# Altium PCB PCB1.PcbDoc
Units mil, origin at the board's own origin, x right, y up, seen from the top; angles counter-clockwise.
Board outline 9050 x 5130 mil, 2 copper layers (Top Layer, Bottom Layer); 85 components, 38 nets, 202 pads, 8 vias.
Unrouted connection lines stored in the file: 1.
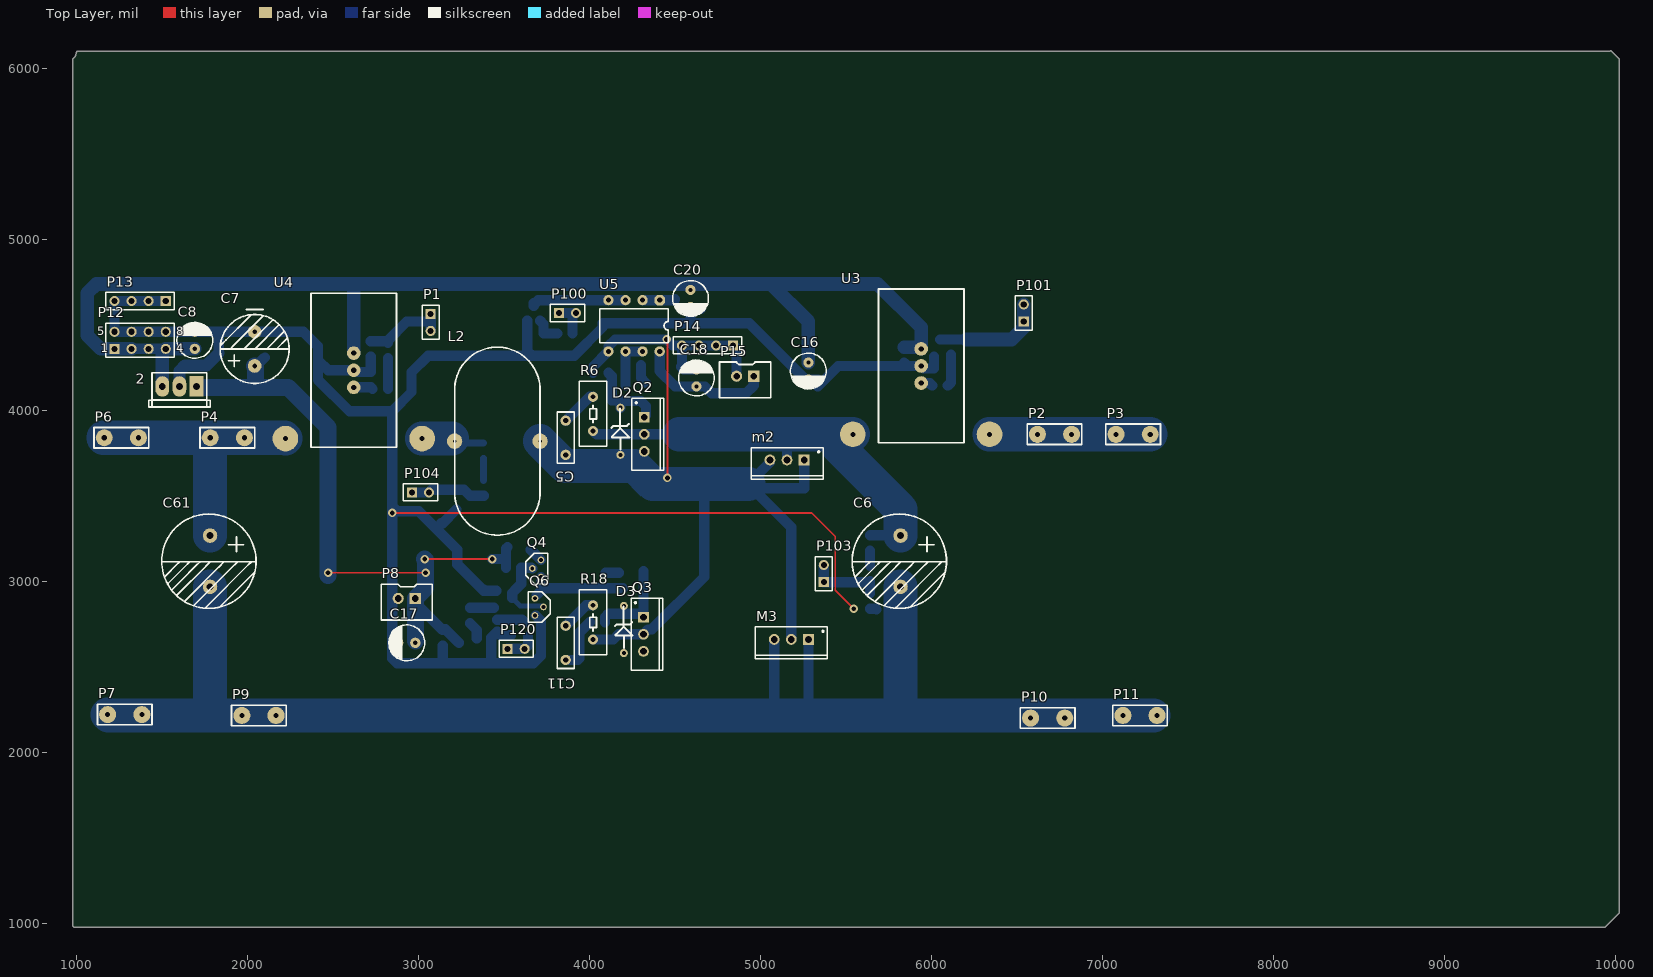
[diagram p0: Top Layer view]
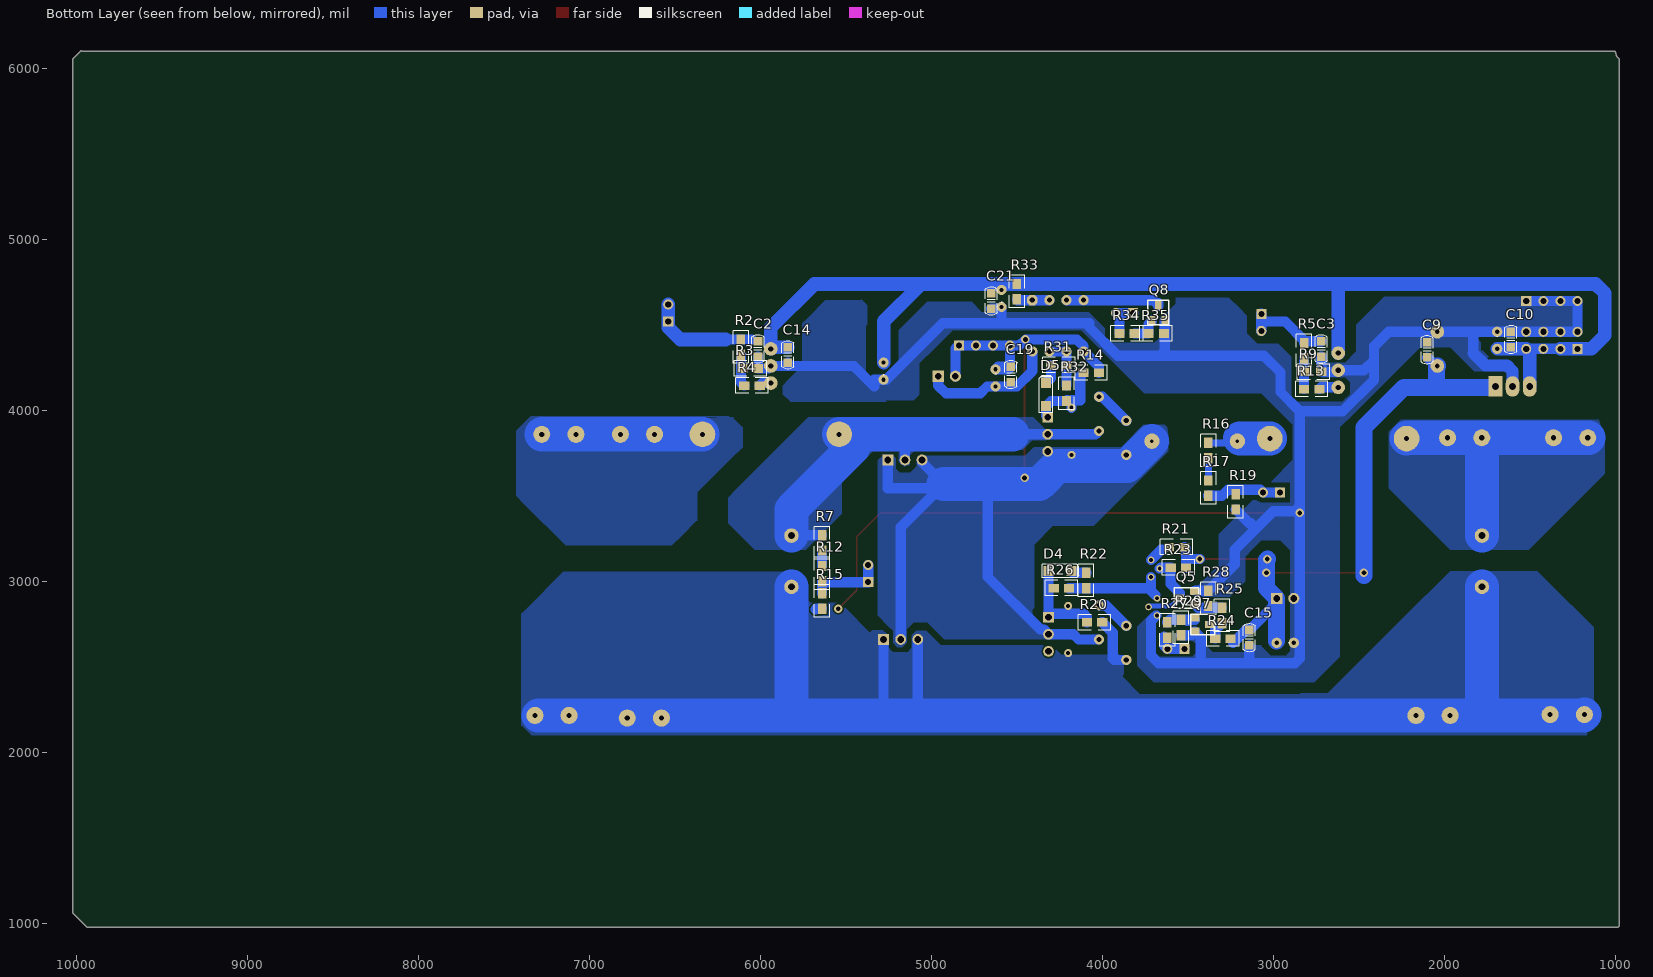
[diagram p1: Bottom Layer view, seen from below]
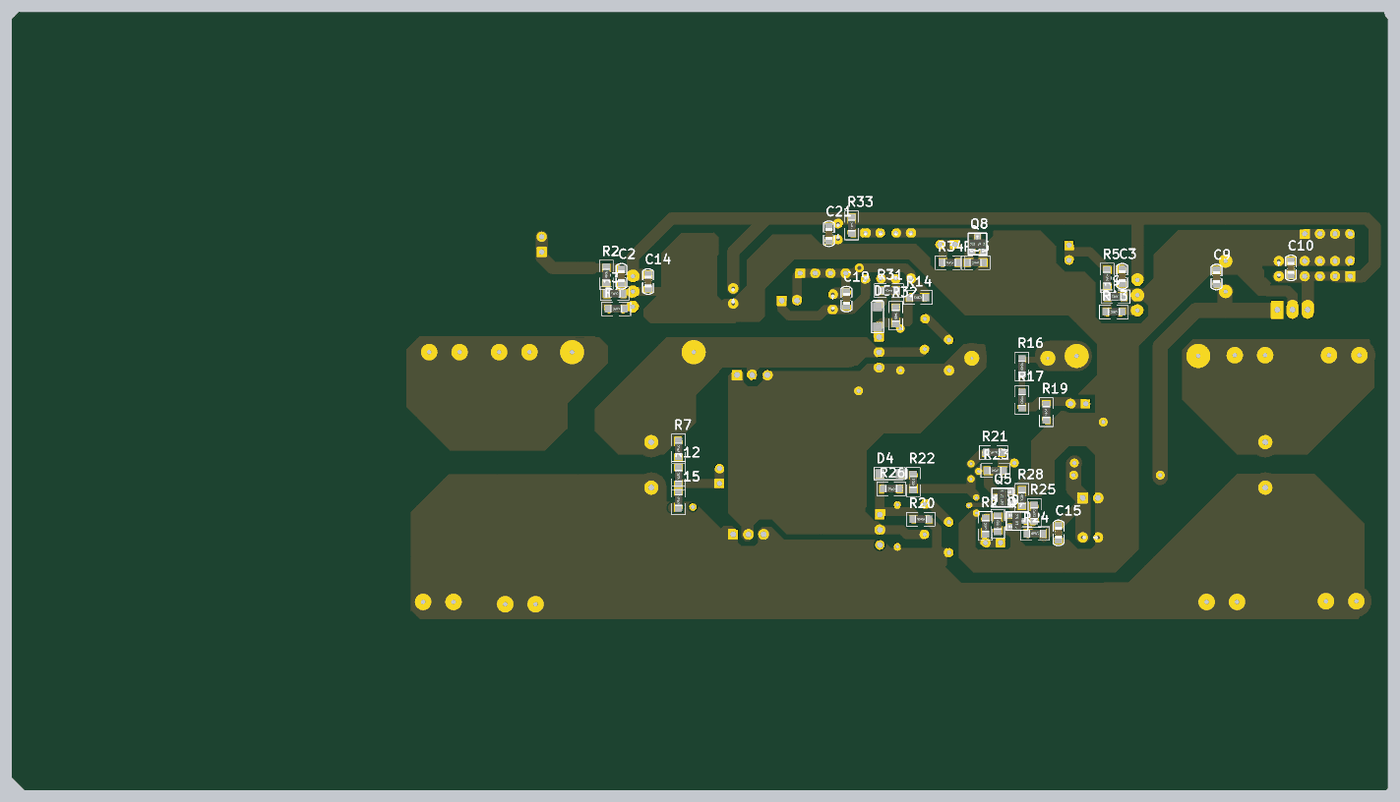
[diagram p2: 3D render of the assembled board from below, using the file's embedded part models]

## Layer stack, top to bottom
Top Layer: signal copper 1.4
Dielectric: dielectric 12.6, FR-4, Dk 4.8
Bottom Layer: signal copper 1.4

## Board outline
990,6070 975,6055 975,1005 975,985 980,980 985,975 1110,975 9940,975 10020,1055 10025,1060 10025,1160 10025,6055 9975,6105 9970,6100 1000,6100

## Design rules (kind name [scope] priority, off if disabled: settings)
Clearance [InNet('NetP104_1')] p1: gap=30
PlaneConnect [All] p1: planeconnectstyle=Direct reliefexpansion=20 reliefentries=4 reliefconductorwidth=10 reliefairgap=10
PolygonConnect [All] p1: connectstyle=Direct reliefconductorwidth=10 reliefentries=4 polygonreliefangle="90 Angle"
RoutingVias [All] p1: holewidth=28 width=50 viastyle="Through Hole" minholewidth=28 minwidth=50 maxholewidth=28 maxwidth=50
SilkscreenOverComponentPads [All] p1: minsilkscreentomaskgap=10
SolderMaskExpansion [All] p1: expansion=4
Width [All] p1: maxlimit=200 minlimit=10 preferedwidth=60 toplayer_maxwidth=10 toplayer_prefwidth=10 minimp=50.000000 maximp=50.000000 favimp=50.000000
26 further rules are at their usual default settings.

## Components (designator, comment, footprint, x,y, rotation, side; value= is the part's Value field where it differs from the comment)
2 "Volt Reg" 7812 1700,4140 r180 top
C2 "103" C0805 6015,4405 r270 bottom
C3 "103" C0805 2720,4405 r270 bottom
C5 "681" 接线端子 3860,3940 r270 top
C6 "1000UuF 63V" RB.4/.8 5820,3120 r270 top
C7 "" RB.2/.4_1 2040,4260 r90 top
C8 "" RB.1/.2 1690,4360 r90 top
C9 "104" C0805 2100,4400 r270 bottom
C10 "104" C0805 1610,4460 r270 bottom
C11 "681" 接线端子 3860,2740 r270 top
C14 "104" C0805 5840,4280 r90 bottom
C15 "104" C0805 3140,2625 r90 bottom
C16 "" RB.1/.2 5280,4280 r270 top
C17 "" RB.1/.2 2980,2640 r180 top
C18 "10uF/25V" RB.1/.2 4625,4140 r90 top
C19 "104" C0805 4535,4165 r90 bottom
C20 "10uF/16V" RB.1/.2 4590,4705 r270 top
C21 "104" C0805 4650,4685 r270 bottom
C61 "1000UuF 63V" RB.4/.8 1780,3120 r270 top
D2 "D Zener" DIODE0.4_ZD 4180,3740 r90 top
D3 "D Zener" DIODE0.4_ZD 4200,2580 r90 top
D4 "1N4148" 1206d 4315,3060 r180 bottom
D5 "1N4148" 1206d 4330,4025 r90 bottom
L2 "12uH" 130060 3460,3820 r0 top
m2 "MBR20100" SFM-T3/A4.7V 5155,3710 r180 top
M3 "MBR20100" SFM-T3/A4.7V 5180,2660 r180 top
P1 "I1电流检测" HDR1X2 3070,4565 r270 top
P2 "Header 2" 冷压插头 6720,3860 r180 top
P3 "Header 2" 冷压插头 7180,3860 r180 top
P4 "Header 2" 冷压插头 1880,3840 r0 top
P6 "Header 2" 冷压插头 1260,3840 r180 top
P7 "Header 2" 冷压插头 1280,2220 r180 top
P8 "Header 2" SIP2_B 2980,2900 r180 top
P9 "Header 2" 冷压插头 2065,2215 r180 top
P10 "Header 2" 冷压插头 6680,2200 r180 top
P11 "Header 2" 冷压插头 7220,2215 r0 top
P12 "" HDR2X4_CEN 1220,4360 r0 top
P13 "Header 4" HDR1X4 1520,4640 r180 top
P14 "Header 4" HDR1X4 4840,4380 r180 top
P15 "Header 2" SIP2_B 4960,4200 r180 top
P100 "Header 2" HDR1X2 3820,4570 r0 top
P101 "I2电流检测" HDR1X2 6540,4520 r90 top
P103 "U2电压检测" HDR1X2 5370,2995 r90 top
P104 "U1电压检测" HDR1X2 2960,3520 r0 top
P120 "Header 2" HDR1X2 3520,2605 r0 top
Q2 "IRF830" SFM-T3/A4.7V 4320,3860 r270 top
Q3 "IRF830" SFM-T3/A4.7V 4315,2690 r270 top
Q4 "8050" TO-92 3715,3025 r270 top
Q5 "PJ2306" sot-23 3460,2865 r90 bottom
Q6 "8550" TO-92 3680,2900 r90 top
Q7 "PJ2306" sot-23 3460,2785 r270 bottom
Q8 "BSS138" sot-23 3710,4525 r180 bottom
R2 "Res2" R0805 6115,4325 r90 bottom
R3 "51K" R0805 6015,4245 r0 bottom
R4 "10K" R0805 6095,4145 r180 bottom
R5 "Res2" R0805 2820,4305 r90 bottom
R6 "20Ω/2W" S-R2W 4020,3880 r90 top
R7 "Res2" R0805 5640,3180 r90 bottom
R9 "51K" R0805 2720,4225 r0 bottom
R12 "Res2" R0805 5640,3000 r90 bottom
R13 "10K" R0805 2820,4125 r180 bottom
R14 "Res2" R0805 4020,4220 r0 bottom
R15 "Res2" R0805 5640,2840 r90 bottom
R16 "0" R0805 3380,3720 r90 bottom
R17 "22K" R0805 3380,3500 r90 bottom
R18 "20Ω/2W" S-R2W 4020,2660 r90 top
R19 "3K" R0805 3220,3420 r90 bottom
R20 "Res2" R0805 4000,2760 r0 bottom
R21 "Res2" R0805 3520,3200 r0 bottom
R22 "10Ω" R0805 4095,2960 r90 bottom
R23 "Res2" R0805 3600,3080 r180 bottom
R24 "Res2" R0805 3340,2665 r180 bottom
R25 "100R" R0805 3300,2845 r270 bottom
R26 "20Ω" R0805 4195,2960 r0 bottom
R27 "100R" R0805 3620,2760 r270 bottom
R28 "Res2" R0805 3380,2945 r270 bottom
R29 "Res2" R0805 3540,2685 r90 bottom
R31 "Res2" R0805 4210,4265 r0 bottom
R32 "20Ω" R0805 4210,4145 r270 bottom
R33 "470Ω" R0805 4500,4740 r270 bottom
R34 "100Ω" R0805 3900,4450 r180 bottom
R35 "Res2" R0805 3640,4450 r0 bottom
U3 "huo er" 霍尔传感器-40A 5940,4260 r90 top
U4 "huo er" 霍尔传感器-40A 2620,4235 r90 top
U5 "TPL3120" DIP-8 4410,4645 r270 top

## Footprints (in the part's own frame and the unit in brackets; to place one, negate y for a bottom-side part, rotate by r counter-clockwise, add the part's x,y. Pads: shape width x height; smd on the part's side, far side on the other; paste and mask are expansions set on the pad)
1206d [mil]
  rect 60x60 smd: 1(0,0) 2(135,0)
  silkscreen extent -38,-40 178,40
7812 [mil]
  rect 80x120 hole 39.37: 1(0,0)
  oval 80x120 hole 39.37: 2(100,0) 3(200,0)
  silkscreen extent -80,-80 280,120
130060 [mil]
  round 90 hole 20: 1(-250,0) 2(250,0)
  silkscreen extent -250,-550 250,550
C0805 [mil]
  rect 50x50 smd: 1(0,0) 2(90,0)
  silkscreen extent -39,-36 129,36, body extent 6,-24 85,23, height 47
DIODE0.4_ZD [mm]
  round 1.2 hole 0.6: 1(0,0) 2(7,0)
  silkscreen extent 0.78,-1.32 6.9,1.32
DIP-8 [mil]
  oct 60x60 hole 30: 1(0,0)
  round 60 hole 30: 2(0,-100) 3(0,-200) 4(0,-300) 5(300,-300) 6(300,-200) 7(300,-100) 8(300,0)
  silkscreen extent 50,-350 250,50, body extent -5,-365 305,65, height 200
HDR1X2 [mm] "Connector; Header; 2 Position"
  rect 1.5x1.5 hole 0.9: 1(0,0)
  round 1.5 hole 0.9: 2(2.54,0)
  silkscreen extent -1.27,-1.27 3.81,1.27
HDR1X4 [mm] "Connector; Header; 4 Position"
  rect 1.5x1.5 hole 0.9: 1(0,0)
  round 1.5 hole 0.9: 2(2.54,0) 3(5.08,0) 4(7.62,0)
  silkscreen extent -1.27,-1.27 8.89,1.27
HDR2X4_CEN [mm] "Connector; Header; 4x2 Position"
  rect 1.5x1.5 hole 0.9: 1(0,0)
  round 1.5 hole 0.9: 2(2.54,0) 3(5.08,0) 4(7.62,0) 5(0,2.54) 6(2.54,2.54) 7(5.08,2.54) 8(7.62,2.54)
  silkscreen extent -1.27,-1.27 8.89,3.81
R0805 [mil]
  rect 60x50 smd: 1(0,0) 2(90,0)
  silkscreen extent -50,-45 140,45, body extent 6,-25 85,25, height 22
RB.1/.2 [mil]
  round 60 hole 25: 1(0,0) 2(100,0)
  silkscreen extent -55,-105 155,105, body extent -50,-99 148,100, height 454
RB.2/.4_1 [mil]
  round 80 hole 27.56: 1(0,0) 2(200,0)
  silkscreen extent -102,-202 330,202
RB.4/.8 [mm]
  round 2.159 hole 1: 1(-3.75,-0.025) 2(3.87,-0.025)
  silkscreen extent -6.95,-7.21 7.07,6.81
S-R2W [mm]
  round 1.5 hole 0.7: 1(-0.006,0) 2(5.074,0)
  silkscreen extent -2.29,-2.03 7.36,2.03
SFM-T3/A4.7V [mm] "TO, Thru-Hole, Vertical, Heatsink Mounted; 3 In-Line Leads; Pitch 2.54 mm"
  rect 1.6x1.6 hole 1: 1(-2.54,0)
  round 1.6 hole 1: 2(0,0) 3(2.54,0)
  silkscreen extent -5.35,-1.85 5.35,2.85, body extent -5.4,-1.9 5.4,2.9, height 19.3
SIP2_B [mil]
  rect 65x65 hole 39.37: 1(0,0)
  round 65 hole 39.37: 2(100,0)
  silkscreen extent -100,-83 200,126
sot-23 [mm]
  rect 1x1.4 smd: 1(0,0) 2(1.9,0) 3(0.95,2.2)
  silkscreen extent -0.6,-0.6 2.5,3, body extent -0.51,-0.18 2.39,2.62
TO-92 [mm]
  round 1 hole 0.55: 1(0,0) 2(-1.27,-1.27) 3(-2.54,0)
  silkscreen extent -3.56,-2.29 1.02,1.02
冷压插头 [mil]
  round 100 hole 30: 1(-100,0) 2(100,0)
  silkscreen extent -160,-60 160,60
接线端子 [mil]
  round 60 hole 30: 1(0,0) 2(200,0)
  silkscreen extent -50,-50 250,50
霍尔传感器-40A [mil]
  round 80 hole 30: 1(-100,0) 2(0,0) 3(100,0)
  round 150 hole 30: 4(-400,400) 5(-400,-400)
  silkscreen extent -450,-250 450,250

## Part data
2: "Voltage Regulator"
C2 C3 C9 C10 C14 C15: library part CAP, "Capacitor"
C5 C11 C19 C21: library part Cap, "Capacitor"
C6 C18 C20 C61: library part "CAPACITOR POL", "Capacitor"
C7 C8 C16 C17: library part "Cap Pol1", "Polarized Capacitor (Radial)"
D2 D3: "Zener Diode"
D4 D5: library part Diode, "Default Diode"
L2: library part Inductor_2, "Inductor"
m2 M3: library part 20010
P1 P101 P103 P104: library part "Header 2", "Header, 2-Pin"
P2 P3 P4 P6 P7 P8 P9 P10 P11 P15 P100 P120: "Header, 2-Pin"
P12: library part "Header 4X2A", "Header, 4-Pin, Dual row"
P13 P14: "Header, 4-Pin"
Q2 Q3 Q5 Q7 Q8: library part IRF840, "CQ-IRF840"
Q4: library part 2N3904, "NPN General Purpose Amplifier"
Q6: library part PNP, "PNP Bipolar Transistor"
R2 R5 R7 R12 R14 R15 R20 R21 R23 R24 R28 R29 R31 R35: "Resistor"
R3 R4 R9 R13 R16 R17 R19 R22 R25 R26 R27 R32 R33 R34: library part Res2, "Resistor"
R6 R18: library part R
U3 U4: library part HOUER
U5: library part LM386

## Via types
v1: diameter 50, hole 28, Top Layer to Bottom Layer, 8 vias

## Nets (pads, with @x,y where several pads share a name; then routed paths per layer and width w, separated by ;. In a path a pad name is that pad's centre, name@x,y a point inside that pad or via, vN(x,y) a via of type N, cw(c..) or ccw(c..) an arc to the next point about the centre after c; other vN are vias at no path point)
GND: C6.2 C11.2 C61.2 D3.1 M3.1 M3.3 P7.1 P7.2 P9.1 P9.2 P10.1 P10.2 P11.1 P11.2 R20.1 | length 8745.7
  Bottom Layer w60: C11.2@3880,2540 3930,2540 ; 3940,2550 3940,2700 R20.1 ; 5080,2240 M3.3 ; 5280,2245 M3.1
  Bottom Layer w200: P7.2 1185,2215 1760,2215 ; C61.2 1779.02,2234.02 1760,2215 ; 5819.02,2215 P9.1 P9.2 1760,2215 ; C6.2 5819.02,2230.98 5835,2215 P11.1 P11.2@7300,2215
GND1: 2.2 C2.2 C3.2 C7.2 C8.2 C9.1 C10.1 C14.1 C15.1 C16.2 C17.2 C20.2 C21.2 P8.2 P12.5 P12.6 P12.7 P12.8 P13.1 P13.2 P13.3 P13.4 Q5.2 Q6.3 Q7.2 Q8.2 R3.1 R9.1 R15.1 R19.1 R28.1 R29.1 R35.1 U3.2 U4.2 | length 14861.5
  Top Layer w10: v1(2845,3400) 5300,3400 5437.5,3262.5 5437.5,2947.5 v1(5545,2840)
  Bottom Layer w60: P13.1 P13.2 P13.3 P13.4 P12.5 P12.6 P12.7 P12.8 C10.1 C8.2 1830,4460 ; 1830,4335 1830,4460 ; C3.2 R9.1 2630,4225 U4.2 2470,4235 2410,4295 ; 3130,3340 3140,3340 R19.1 ; 3140,2525 C15.1 ; R28.1@3380,2950 R28.1 ; Q5.2@3454.8,2945 R28.1 ; R29.1 3480,2685 3460,2705 3425,2670 3425,2540 3445,2520 ; Q8.2 3635,4524.8 3635,4320 ; 3660,4325 3655,4320 ; Q6.3@3685,2800 3715,2770 3715,2565 3670,2520 3445,2520 ; C21.2 4600,4595 C20.2 4590,4515 4585,4510 ; 4985,4460 5142.5,4302.5 ; 5335,4140 5455,4260 5640,4260 ; 5335,4180 C16.2 5265,4180 5142.5,4302.5 ; 5600,4260 5640,4260 ; R15.1 5674.02,2840 5679.02,2835 ; C14.1 C14.1@5860,4260 ; C2.2 R3.1 5955,4245 U3.2 C14.1@5860,4260 ; 1830,4460 C7.2 2325,4460 2410,4375 2410,4295 ; 2410,4295 2410,4180 2595,3995 2845,3995 ; 2845,3440 2845,3995 ; 2845,3440 v1(2845,3400) 2845,2900 2845,2550 2875,2520 3445,2520 ; 2845,3440 2875,3410 3000,3410 3225,3185 3225,3100 R28.1 ; 2845,3995 2957.5,4107.5 2957.5,4222.5 3055,4320 3635,4320 ; 3635,4320 3655,4320 ; 3655,4320 3910,4320 4075,4485 4075,4510 4585,4510 ; 4585,4510 4935,4510 5142.5,4302.5 ; 5640,4260 5665,4260 C14.1@5860,4260
  Bottom Layer w70: 2.2 1600,4230 1632.5,4262.5 1757.5,4262.5 1830,4335
NetC2_1: C2.1 P101.1 P101.2 R2.2 | length 654
  Bottom Layer w60: 6050,4415 R2.2 6205,4415
  Bottom Layer w80: 6205,4415 6470,4415 6540,4485 P101.1 P101.2
NetC3_1: C3.1 P1.1 P1.2 R5.2 | length 514.7
  Bottom Layer w60: C3.1 R5.2@2815,4405 ; R5.2 2815,4400 R5.2@2815,4405 ; R5.2@2820,4405 R5.2@2815,4405 ; P1.2 3070,4520 ; P1.1 3070,4520 ; R5.2@2815,4405 2930,4520 3070,4520
NetC5_1: C5.1 R6.2 | length 217.9
  Bottom Layer w60: C5.1 3999.75,4079.75 R6.2
NetC6_1: C6.1 m2.2 Q2.2 R6.1 R7.2 U3.4 | length 2494.2
  Bottom Layer w60: R6.1 4039.75,3860 Q2.2 4525,3860 ; m2.2 5155,3835 ; R7.2 5816.65,3270 C6.1
  Bottom Layer w200: 4525,3860 U3.4 ; 5460,3780 5819.02,3420.98 C6.1
NetC11_1: C11.1 R18.2 | length 209.6
  Bottom Layer w60: C11.1 3979.75,2859.75 R18.2
NetC61_1: C61.1 P4.1 P4.2 P6.1 P6.2 U4.4 | length 1639.8
  Bottom Layer w200: P6.2@1155,3840 1260,3840 1460,3840 P4.1 ; C61.1 1779.02,3839.02 P4.1 ; U4.4 2215,3840 P4.2 P4.1
NetD2_2: D2.2 D5.1 Q2.1 R14.2 R32.2 | length 481.7
  Bottom Layer w60: R14.2 4130,4200 4130,4060 4180,4060 ; D2.2 4180,4035 4205,4060 R32.2 4300,4055 D5.1 4330,3970 Q2.1
NetD3_2: D3.2 D4.1 Q3.1 R20.2 R26.2 | length 541.6
  Bottom Layer w60: R20.2 4090,2790 4110,2810 4295,2810 Q3.1 D4.1
NetD4_2: D4.2 R22.2 | length 75
  Bottom Layer w60: R22.2 D4.2@4170,3050
NetD5_2: D5.2 R31.2 | length 117.4
  Bottom Layer w60: R31.2 4300,4190 D5.2
NetL2_1: L2.1 R16.2 U4.5 | length 380.4
  Bottom Layer w40: L2.1@3195,3835 L2.1 3220,3810 R16.2
  Bottom Layer w60: L2.1@3195,3835 L2.1@3205,3835
  Bottom Layer w200: U4.5 L2.1@3195,3835
NetP2_1: P2.1 P2.2 P3.1 P3.2 U3.5 | length 940
  Bottom Layer w200: U3.5 P2.2 P2.1 P3.2 P3.1
NetP103_1: P103.1 P103.2 R12.1 R15.2 | length 442.1
  Bottom Layer w60: P103.2 P103.1 5635,2995 R12.1 R15.2
NetP104_1: P104.1 P104.2 R17.1 R19.2 | length 440.7
  Bottom Layer w60: P104.1 P104.2 3075,3535 3265,3535 3300,3500 R17.1
NetQ4_1: Q4.2 Q5.3 Q6.2 R23.1 | length 471.9
  Bottom Layer w30: Q5.3 3594.02,2855 3725,2855 Q6.2 ; 3546.61,2931.61 3565,2950
  Bottom Layer w60: Q5.3 3546.61,2931.61 ; 3565,2950 3600,2985 R23.1 3660,3080 Q4.2
NetQ4_2: Q4.3 R21.2 | length 84.9
  Bottom Layer w60: 3655,3185 Q4.3
NetQ4_3: Q4.1 Q6.1 R22.1 R26.1 | length 586.6
  Bottom Layer w60: 3690,2920 3730,2960 R22.1 R26.1 ; 3715,2960 Q4.1
NetQ5_1: Q5.1 R25.1 R28.2 | length 140
  Bottom Layer w60: R25.1 3440,2845
NetQ7_1: Q7.1 R27.1 R29.2 | length 173.5
  Bottom Layer w60: Q7.1@3460,2775 3495,2775 ; 3500.12,2769.88 3495,2775 ; R27.1 3605,2775 R29.2 3495,2775
NetQ7_3: Q7.3 R24.1 R25.2 | length 106.6
  Bottom Layer w60: R25.2 3340,2715 R24.1
NetQ8_1: Q8.1 R34.2 R35.2 | length 163.3
  Bottom Layer w60: Q8.1 3730,4505 R35.2 R34.2
NetQ8_3: Q8.3 U5.3 | length 564.7
  Bottom Layer w60: Q8.3 Q8.3@3672.6,4617.6 ; Q8.3@3672.6,4627.6 Q8.3@3672.6,4617.6 ; U5.3 4110,4645 3700,4645 Q8.3@3672.6,4617.6
NetR2_1: R2.1 R3.2 R4.1 | length 188.3
  Bottom Layer w60: R4.1 6115,4165 R2.1
NetR4_2: R4.2 U3.1 | length 71.2
  Bottom Layer w60: U3.1 5990,4160 R4.2
NetR5_1: R5.1 R9.2 R13.1 | length 180
  Bottom Layer w60: R13.1 R5.1
NetR7_1: R7.1 R12.2 | length 90
  Bottom Layer w60: R12.2 R7.1
NetR13_2: R13.2 U4.1 | length 114.1
  Bottom Layer w60: U4.1 2720,4135 R13.2
NetR16_1: R16.1 R17.2 | length 130
  Bottom Layer w40: R17.2 R16.1
NetR31_1: R31.1 R32.1 U5.6 U5.7 | length 300
  Bottom Layer w60: R32.1 R31.1 U5.6 U5.7
NetR33_2: R33.2 U5.2 | length 192.1
  Bottom Layer w60: U5.2 4410,4645 4495,4645 R33.2
PWM1_IN: P120.1 P120.2 R27.2 | length 178.3
  Bottom Layer w60: P120.1 P120.2 3640,2625 R27.2@3640,2675
PWM2_IN: P100.1 P100.2 R34.1 | length 200
  Bottom Layer w60: P100.1 P100.2 ; R34.1 P100.2@3900,4550
"VCC +12V": 2.1 C7.1 C9.2 C15.2 C17.1 P8.1 R21.1 R23.2 R24.2 | length 3895.9
  Top Layer w10: v1(2470,3050) v1(3040,3050) ; v1(3035,3130) v1(3430,3130)
  Bottom Layer w60: C7.1@2045,4255 C9.2 ; 2980,2840 3015,2840 C15.2@3135,2720 ; C15.2 C15.2@3135,2720 ; R24.2@3235,2640 3155,2720 C15.2@3135,2720 ; v1(3430,3130) 3510,3130 ; R23.2 3510,3130 ; R21.1 3510,3190 3510,3130
  Bottom Layer w100: 1745,4135 2235,4135 2470,3900 v1(2470,3050) v1@2470,3035 ; C7.1 2045,4255 2045,4150 ; C17.1@2980,2652.28 2980,2840 P8.1 3040,2960 v1(3040,3050) 3040,3125 v1(3035,3130)
"VCC +15V": C18.1 C19.1 P15.1 U5.8 | length 792.5
  Bottom Layer w60: U5.8 4410,4230 4500,4140 C18.1 4675,4140 4715,4100 4915,4100 4960,4145 P15.1
VCC+5V: 2.3 C8.1 C10.2 C14.2 C16.1 C20.1 C21.1 P12.1 P12.2 P12.3 P12.4 R33.1 U3.3 U4.3 | length 7303.4
  Bottom Layer w60: P12.2 P12.3 1485,4360
  Bottom Layer w80: P12.2 P12.1 1140,4360 1060,4440 1060,4685 1115,4740 2640,4740 ; 2.3 1500,4340 P12.4 C8.1 ; U4.3 2620,4490 2620,4550 2620,4720 2640,4740 ; C16.1 5280,4520 5060,4740 ; C14.2 5930,4370 U3.3 5940,4485 5685,4740 5060,4740 ; 2640,4740 R33.1 4950,4740 5060,4740
WGND: C5.2 C18.2 C19.2 D2.1 L2.2 m2.1 m2.3 M3.2 P14.1 P14.2 P14.3 P14.4 P15.2 Q2.3 Q3.2 R14.1 R18.1 U5.5 | length 6610.8
  Top Layer w10: v1(4450,4415) 4455,4410 v1(4455,3605)
  Bottom Layer w60: R18.1 4139.75,2659.75 4170,2690 Q3.2 4343.5,2718.5 4363.06,2718.5 4670,3025.44 4670,3568.5 ; R14.1 4020,4255 U5.5 4110,4375 4150,4415 v1(4450,4415) 4485,4380 P14.4 ; C19.2 C19.2@4540,4255 ; P15.2 4860,4360 P14.1 P14.2 P14.3 P14.4 ; m2.3 5055,3695 4928.5,3568.5 4952.01,3545 ; M3.2 5180,3317.01 4952.01,3545 ; m2.1 5255,3545 4952.01,3545 ; C19.2@4540,4255 4610,4255 C18.2 4550,4240 4540,4250 C19.2@4540,4255 ; C19.2@4540,4255 P14.4
  Bottom Layer w200: L2.2 3855,3675 4263.5,3675 4370,3568.5 4670,3568.5 4928.5,3568.5
pads on no net: Q3.3 U5.1 U5.4

## Polygon pours and split planes (outlines as drawn)
GND1 on Bottom Layer "Top Overlay-No Net" (solid): 3850,4195 3755,4100 3150,4100 3070,4100 2990,4020 2845,3875 2845,3870 2845,4005 2935,4095 2975,4135 2975,4335 3440,4335
GND1 on Bottom Layer "Bottom Layer-No Net" (solid, remove dead copper, pour order 1000): 1230,4670 1235,4665 1560,4665 2350,4665 2515,4500 2515,4360 2515,4345 2580,4280 2610,4280 2675,4280 2680,4285 2690,4295 2690,4330 2720,4330 2730,4340 2745,4325 2745,4280 2745,4225 2735,4215 2715,4195 2610,4195 2580,4195 2560,4175 2550,4165 2550,4120 2550,4095 2590,4055 2595,4050 2675,4050 2830,4050 2855,4050 2880,4050 2930,4000 2930,3985 2930,3970 2890,3930 2885,3925 2885,3780 2885,3710 3135,3460 3320,3275 3320,3100 3320,3095 3355,3060 3445,2970 3485,2970 3425,2910 3350,2910 3255,2910 3220,2945 3165,3000 3165,3115 3165,3145 3120,3190 3070,3240 3005,3240 2960,3240 2910,3190 2890,3170 2890,3075 2890,2590 2905,2575 2900,2570 2900,2520 2875,2520 2850,2495 2795,2550 2795,2570 2795,2885 2790,2890 2790,3150 2645,3295 2610,3330 2610,3635 2610,3900 2530,3980 2140,4370 2110,4370 1965,4370 1930,4335 1825,4230 1765,4230 1765,4290 1740,4315 1775,4350 1785,4350 1785,4400 1810,4425 1805,4430 1215,4430
GND1 on Bottom Layer "Bottom Layer-No Net" (solid, remove dead copper, pour order 1001): 2610,3330 2610,2575 2610,2560 2700,2470 2760,2410 3570,2410 3700,2410 3790,2500 3795,2505 3795,2670 3795,2735 3710,2820 3690,2800 3690,2680 3690,2570 3670,2550 3660,2560 3480,2560 3475,2560 3455,2580 3455,2640 3460,2640 3480,2660 3485,2665 3485,2715 3450,2715 3400,2665 3400,2660 3400,2630 3375,2605 3355,2585 3165,2585 3150,2585 3110,2625 3070,2625 3070,2620 3055,2605 3015,2565 3000,2565 2945,2565 2925,2565 2920,2570 2900,2590 2900,2610 2900,2665 2900,2860 2900,3200 2905,3205
GND1 on Bottom Layer "Bottom Layer-No Net" (solid, remove dead copper, pour order 1002): 2895,4090 2895,4315 2970,4390 2975,4390 3095,4390 3100,4395 3260,4555 3605,4555 3625,4555 3655,4525 3665,4515 3665,4420 3670,4420 3695,4395 3850,4395 3940,4395 3950,4395 3955,4400 3985,4430 3985,4480 4035,4530 4080,4575 4195,4575 4645,4575 4915,4575 5000,4575 5140,4435 5190,4385 5190,4300 5190,4255 5205,4240 5235,4210 5270,4210 5270,4205 5350,4125 5285,4060 5130,4060 5105,4060 5075,4090 5070,4095 5070,4235 5070,4275 4980,4365 4875,4470 4860,4470 4125,4470 4100,4445 3830,4175 3715,4175 3360,4175 3260,4275 3255,4270 3145,4270 3085,4270 3045,4230 3010,4195 3010,4100 3010,4040 2955,3985 2895,3925 2885,3925
GND1 on Bottom Layer "Bottom Layer-No Net" (solid, remove dead copper, pour order 1003): 5385,4225 5385,4495 5380,4500 5375,4505 5375,4610 5375,4615 5410,4650 5415,4645 5590,4645 5620,4645 5725,4540 5755,4510 5755,4260 5840,4175 5870,4145 5870,4100 5870,4095 5830,4055 5825,4050 5260,4050
GND1 on Bottom Layer "Bottom Layer-No Net" (solid, remove dead copper, pour order 1004): 4705,4575 4765,4635 4770,4635 5025,4635 5055,4605 5190,4470 5190,4375
GND1 on Bottom Layer "Bottom Layer-No Net" (solid, remove dead copper, pour order 1005): 3640,4555 3570,4625 3570,4660 3260,4660 3200,4600 3155,4555 3155,4440
GND on Bottom Layer "Bottom Layer-No Net" (solid, remove dead copper, pour order 1006): 1125,2295 1125,2730 1390,2995 1455,3060 1860,3060 1965,3060 2245,2780 2680,2345 2840,2345 2845,2340 3740,2340 3780,2340 3885,2445 3875,2455 3875,2525 3875,2545 3910,2580 3920,2570 4240,2570 4270,2600 4295,2625 4340,2625 4690,2625 4935,2625 4945,2625 5010,2690 5030,2710 5060,2710 5090,2710 5110,2690 5115,2685 5115,2630 5115,2610 5140,2585 5220,2585 5225,2585 5235,2595 5250,2610 5250,2650 5250,2680 5265,2695 5285,2715 5300,2715 5345,2715 5360,2700 5535,2875 5635,2875 5710,2875 5735,2900 5745,2910 5745,3015 5745,3020 5790,3065 5800,3055 6080,3055 6900,3055 7155,3055 7375,2835 7400,2810 7400,2155 7395,2155 7350,2110 7340,2100 1165,2100
NetC61_1 on Bottom Layer "Bottom Layer-No Net" (solid, remove dead copper, pour order 1007): 1060,3835 1060,3630 1360,3330 1505,3185 1620,3185 1965,3185 2325,3545 2325,3835 2325,3875 2280,3920 2255,3945 1095,3945
WGND on Bottom Layer "Bottom Layer-No Net" (solid, remove dead copper, pour order 1008): 3610,3805 3615,3800 3615,3765 3615,3760 3740,3635 4050,3325 4190,3325 4290,3325 4400,3215 4400,3030 4400,2845 4410,2835 4410,2775 4405,2770 4365,2730 4360,2730 4355,2730 4343.5,2718.5 4335,2710 4300,2710 4300,2670 4295,2665 4300,2660 4355,2660 4925,2660 4970,2705 5025,2760 5080,2760 5105,2760 5130,2735 5145,2720 5145,2675 5145,2640 5170,2615 5200,2615 5225,2640 5225,2685 5225,2710 5250,2735 5315,2800 5315,2910 5315,3705 5310,3710 5285,3735 5285,3740 5230,3740 5225,3735 5210,3720 5210,3685 5210,3660 5190,3640 5185,3635 5130,3635 5125,3635 5095,3665 5085,3675 5085,3710 5085,3720 5065,3740 5060,3735 5035,3735 4450,3735 4405,3780 4400,3785 4275,3785 3890,3785 3860,3815 3760,3915 3725,3915 3635,3915 3620,3900
NetC6_1 on Bottom Layer "Bottom Layer-No Net" (solid, remove dead copper, pour order 1009): 4335,3890 4405,3960 4500,3960 5720,3960 6145,3535 6190,3490 6190,3340 6080,3230 6035,3185 5790,3185 5735,3185 5675,3245 5525,3395 5525,3525 5525,3580 5355,3750 5295,3810 5285,3810 5235,3810 5195,3770 5190,3765 5190,3700 5160,3670 5150,3680 5130,3680 5130,3735 5125,3740 5095,3770 5090,3770 4465,3770 4410,3825 4330,3825 4320,3835
NetP2_1 on Bottom Layer "Bottom Layer-No Net" (solid, remove dead copper, pour order 1010): 6330,3955 6325,3960 6160,3960 6160,3955 6115,3910 6105,3900 6105,3805 6105,3785 6180,3710 6370,3520 6370,3355 6375,3355 6465,3265 6520,3210 7110,3210 7140,3210 7385,3455 7430,3500 7430,3825 7430,3880 7345,3965 6185,3965 6180,3960

## Text inside footprints (layer, text, board x,y; h text height)
P12: Top Overlay "5" at 1120,4440 h50; Top Overlay "1" at 1140,4340 h50; Top Overlay "4" at 1580,4340 h50; Top Overlay "8" at 1580,4440 h50